# EAGLE board CT_schematic (EAGLE 7.6.0)

Size 100 x 80 mm. Coordinates in mm from the lower left corner, seen from the top.
Outline: 0,0 100,0 100,80 0,80 0,0
Copper layers (1*16): Top 0.035mm / dielectric 1.5mm / Bottom 0.035mm
Design rules "default": minimum track width 10mil, minimum drill 24mil, track to track 8mil, track to pad 8mil, pad to pad 8mil, via to via 8mil, smd to smd 8mil, copper to edge 40mil, drill to drill 8mil, minimum pad ring 10mil, minimum via ring 8mil, stop-mask expansion 4mil, vias tented up to drill 0mil, thermal gap 10mil

## Footprints (pad centres in the part's own frame; a part is rotated, then mirrored left to right if it is on the bottom)
C0603 = smd 0.8 x 0.8: 1 -0.762,0; 2 0.762,0
C0402 = smd 0.5 x 0.5: 1 -0.508,0; 2 0.508,0
C1210 = smd 1.2 x 2.5: 1 -1.524,0; 2 1.524,0
C0805 = smd 1.2 x 1.3: 1 -1.016,0; 2 1.016,0
EXV-9B = smd 2.718 x 1.778: 1 -2.108,0; 2 2.108,0
EXV-9H = smd 3.505 x 1.676: 1 -2.857,0; 2 2.857,0
PJ-037B_PACKAGE = drill 3.7 square: 1 12,0 | drill 3.2 square: 2 6,0
R0603 = smd 0.8 x 0.8: 1 -0.762,0; 2 0.762,0
UFBGA64 = smd 0.2 x 0.2: A1 -1.75,1.75; A2 -1.25,1.75; A3 -0.75,1.75; A4 -0.25,1.75; A5 0.25,1.75; A6 0.75,1.75; A7 1.25,1.75; A8 1.75,1.75; B1 -1.75,1.25; B2 -1.25,1.25; B3 -0.75,1.25; B4 -0.25,1.25; B5 0.25,1.25; B6 0.75,1.25; B7 1.25,1.25; B8 1.75,1.25; C1 -1.75,0.75; C2 -1.25,0.75; C3 -0.75,0.75; C4 -0.25,0.75; C5 0.25,0.75; C6 0.75,0.75; C7 1.25,0.75; C8 1.75,0.75; D1 -1.75,0.25; D2 -1.25,0.25; D3 -0.75,0.25; D4 -0.25,0.25; D5 0.25,0.25; D6 0.75,0.25; D7 1.25,0.25; D8 1.75,0.25; E1 -1.75,-0.25; E2 -1.25,-0.25; E3 -0.75,-0.25; E4 -0.25,-0.25; E5 0.25,-0.25; E6 0.75,-0.25; E7 1.25,-0.25; E8 1.75,-0.25; F1 -1.75,-0.75; F2 -1.25,-0.75; F3 -0.75,-0.75; F4 -0.25,-0.75; F5 0.25,-0.75; F6 0.75,-0.75; F7 1.25,-0.75; F8 1.75,-0.75; G1 -1.75,-1.25; G2 -1.25,-1.25; G3 -0.75,-1.25; G4 -0.25,-1.25; G5 0.25,-1.25; G6 0.75,-1.25; G7 1.25,-1.25; G8 1.75,-1.25; H1 -1.75,-1.75; H2 -1.25,-1.75; H3 -0.75,-1.75; H4 -0.25,-1.75; H5 0.25,-1.75; H6 0.75,-1.75; H7 1.25,-1.75; H8 1.75,-1.75
TST-110-05-T-D-RA = drill 1 pad 1.7 square: 1 0,0 | drill 1 pad 1.7: 2 0,2.54; 3 2.54,0; 4 2.54,2.54; 5 5.08,0; 6 5.08,2.54; 7 7.62,0; 8 7.62,2.54; 9 10.16,0; 10 10.16,2.54; 11 12.7,0; 12 12.7,2.54; 13 15.24,0; 14 15.24,2.54; 15 17.78,0; 16 17.78,2.54; 17 20.32,0; 18 20.32,2.54; 19 22.86,0; 20 22.86,2.54
SOIC-8 = smd 1.6 x 0.6: 1 -2.7,1.905 | smd 1.55 x 0.6: 2 -2.7,0.635; 3 -2.7,-0.635; 4 -2.7,-1.905; 5 2.7,-1.905; 6 2.7,-0.635; 7 2.7,0.635; 8 2.7,1.905
SSOP-28 = smd 1.5 x 0.4: 1 -3.625,4.225; 2 -3.625,3.575; 3 -3.625,2.925; 4 -3.625,2.275; 5 -3.625,1.625; 6 -3.625,0.975; 7 -3.625,0.325; 8 -3.625,-0.325; 9 -3.625,-0.975; 10 -3.625,-1.625; 11 -3.625,-2.275; 12 -3.625,-2.925; 13 -3.625,-3.575; 14 -3.625,-4.225; 15 3.625,-4.225; 16 3.625,-3.575; 17 3.625,-2.925; 18 3.625,-2.275; 19 3.625,-1.625; 20 3.625,-0.975; 21 3.625,-0.325; 22 3.625,0.325; 23 3.625,0.975; 24 3.625,1.625; 25 3.625,2.275; 26 3.625,2.925; 27 3.625,3.575; 28 3.625,4.225
182-009-MALE = drill 1.194 pad 1.524 octagon: 1 -5.537,10.923; 2 -2.769,10.923; 3 0,10.923; 4 2.769,10.923; 5 5.537,10.923; 6 -4.153,8.08; 7 -1.384,8.08; 8 1.384,8.08; 9 4.153,8.08 | hole 3.048: -12.446,9.501; 12.446,9.501
QFN-28 = smd 0.813 x 0.305: 1 -2.451,1.5; 2 -2.451,1; 3 -2.451,0.5; 4 -2.451,0; 5 -2.451,-0.5; 6 -2.451,-1; 7 -2.451,-1.5; 15 2.451,-1.5; 16 2.451,-1; 17 2.451,-0.5; 18 2.451,0; 19 2.451,0.5; 20 2.451,1; 21 2.451,1.5 | smd 0.305 x 0.813: 8 -1.5,-2.451; 9 -1,-2.451; 10 -0.5,-2.451; 11 0,-2.451; 12 0.5,-2.451; 13 1,-2.451; 14 1.5,-2.451; 22 1.5,2.451; 23 1,2.451; 24 0.5,2.451; 25 0,2.451; 26 -0.5,2.451; 27 -1,2.451; 28 -1.5,2.451 | smd 3.607 x 3.607: 29 0,0
SJ-43515TS-SMT-TR = smd 2.2 x 3: 1 0.6,-7.4; 4 3.4,-7.4 | smd 3 x 3: 2 12.8,-7.4; 5 17,-3 | smd 2 x 3: 3 5.3,0; 6 2.5,0 | drill 1.8: P$7 4.5,-3.69; P$8 11.54,-3.69
ASEK = smd 1.4 x 1: 1 -1.1,-0.8; 2 1.1,-0.8; 3 1.1,0.8; 4 -1.1,0.8
ASFL1 = smd 1.7 x 1.5: 1 -1.27,-1.1; 2 1.27,-1.1; 3 1.27,1.1; 4 -1.27,1.1
LP2954 = smd 1.6 x 0.6: 1 -2.475,1.905 | smd 1.55 x 0.6: 2 -2.475,0.635; 3 -2.475,-0.635; 4 -2.475,-1.905; 5 2.475,-1.905; 6 2.475,-0.635; 7 2.475,0.635; 8 2.475,1.905
SON-6 = smd 0.55 x 0.3: 1 -0.355,0.5 | smd 0.52 x 0.3: 2 -0.37,0; 3 -0.37,-0.5; 4 0.37,-0.5; 5 0.37,0; 6 0.37,0.5
SW_4-1437565-2 = smd 1.4 x 2.1: 1 -2.23,4.55; 2 -2.23,-4.55; 3 2.23,4.55; 4 2.23,-4.55
LGM67K-G1J2-24-Z = smd 0.8 x 1.4: A -2,0; C 0,0
NC7SZ125M5X = smd 1.3 x 0.7: 1 -1.3,0.95; 2 -1.3,0; 3 -1.3,-0.95; 4 1.3,-0.95; 5 1.3,0.95

## Placement (x,y rotation side)
C1  1e-06  [C0603]  -63.5,82.55 0 top  (outside the outline)
C2  1e-07  [C0603]  -67.31,82.55 0 top  (outside the outline)
C3  1e-07  [C0603]  -71.12,82.55 0 top  (outside the outline)
C4  1e-07  [C0603]  -74.93,82.55 0 top  (outside the outline)
C5  1e-07  [C0603]  -78.74,82.55 0 top  (outside the outline)
C6  1e-07  [C0603]  -82.55,82.55 0 top  (outside the outline)
C7  4.7e-06  [C0603]  -59.69,82.55 0 top  (outside the outline)
C8  1e-08  [C0603]  -15.24,87.63 0 top  (outside the outline)
C9  1e-06  [C0603]  -19.05,87.63 0 top  (outside the outline)
C10  1e-07  [C0402]  -45.72,87.63 0 top  (outside the outline)
C11  1e-08  [C0402]  -49.53,87.63 0 top  (outside the outline)
C12  1e-07  [C0402]  -53.34,87.63 0 top  (outside the outline)
C13  1e-07  [C0402]  -57.15,87.63 0 top  (outside the outline)
C14  1e-07  [C0402]  -60.96,87.63 0 top  (outside the outline)
C15  1e-07  [C0402]  -64.77,87.63 0 top  (outside the outline)
C16  1e-07  [C0402]  -68.58,87.63 0 top  (outside the outline)
C17  2.2e-05  [C1210]  -48.26,69.85 0 top  (outside the outline)
C18  2.2e-05  [C1210]  -54.61,69.85 0 top  (outside the outline)
C19  1e-09  [C0402]  -72.39,87.63 0 top  (outside the outline)
C20  1e-09  [C0402]  -76.2,87.63 0 top  (outside the outline)
C21  1e-07  [C0402]  -80.01,87.63 0 top  (outside the outline)
C22  1e-07  [C0402]  -15.24,92.71 0 top  (outside the outline)
C23  1e-07  [C0402]  -19.05,92.71 0 top  (outside the outline)
C24  1e-07  [C0402]  -22.86,92.71 0 top  (outside the outline)
C25  1e-07  [C0402]  -26.67,92.71 0 top  (outside the outline)
C26  1e-05  [C0805]  -21.59,76.2 0 top  (outside the outline)
C27  1e-05  [C0805]  -26.67,76.2 0 top  (outside the outline)
C28  1e-05  [C0805]  -31.75,76.2 0 top  (outside the outline)
C29  1e-05  [C0805]  -36.83,76.2 0 top  (outside the outline)
C30  1e-05  [C0805]  -41.91,76.2 0 top  (outside the outline)
C31  1e-08  [C0402]  -30.48,92.71 0 top  (outside the outline)
C32  1e-08  [C0402]  -34.29,92.71 0 top  (outside the outline)
C33  1e-08  [C0402]  -38.1,92.71 0 top  (outside the outline)
C34  1e-06  [EXV-9B]  -62.23,68.58 0 top  (outside the outline)
C35  2.2e-06  [EXV-9B]  -71.12,68.58 0 top  (outside the outline)
C36  1e-07  [C0402]  -41.91,92.71 0 top  (outside the outline)
C37  0.0001  [EXV-9H]  -74.93,62.23 0 top  (outside the outline)
C38  0.0001  [EXV-9H]  -17.78,69.85 0 top  (outside the outline)
C39  1e-08  [C0402]  -45.72,92.71 0 top  (outside the outline)
C40  1e-08  [C0402]  -49.53,92.71 0 top  (outside the outline)
J1  PJ-037B  [PJ-037B_PACKAGE]  -83.82,29.21 0 top  (outside the outline)
R2  1000.0  [R0603]  -22.86,87.63 0 top  (outside the outline)
R4  4700.0  [R0603]  -26.67,87.63 0 top  (outside the outline)
R5  2200.0  [R0603]  -30.48,87.63 0 top  (outside the outline)
R6  2200.0  [R0603]  -34.29,87.63 0 top  (outside the outline)
R7  10000.0  [R0603]  -82.55,76.2 0 top  (outside the outline)
R8  10000.0  [R0603]  -15.24,82.55 0 top  (outside the outline)
R9  10000.0  [R0603]  -20.32,82.55 0 top  (outside the outline)
R10  10000.0  [R0603]  -25.4,82.55 0 top  (outside the outline)
R11  10000.0  [R0603]  -30.48,82.55 0 top  (outside the outline)
R12  100000.0  [R0603]  -52.07,76.2 0 top  (outside the outline)
R13  47000.0  [R0603]  -35.56,82.55 0 top  (outside the outline)
R14  47000.0  [R0603]  -40.64,82.55 0 top  (outside the outline)
R15  47000.0  [R0603]  -45.72,82.55 0 top  (outside the outline)
R16  680.0  [R0603]  -38.1,87.63 0 top  (outside the outline)
R17  100000.0  [R0603]  -57.15,76.2 0 top  (outside the outline)
R18  100000.0  [R0603]  -62.23,76.2 0 top  (outside the outline)
R19  164658.62  [R0603]  -46.99,76.2 0 top  (outside the outline)
R20  100000.0  [R0603]  -67.31,76.2 0 top  (outside the outline)
R21  10000.0  [R0603]  -50.8,82.55 0 top  (outside the outline)
R22  10000.0  [R0603]  -55.88,82.55 0 top  (outside the outline)
R23  9100.0  [R0603]  -41.91,87.63 0 top  (outside the outline)
R24  680000.0  [R0603]  -72.39,76.2 0 top  (outside the outline)
R25  120000.0  [R0603]  -77.47,76.2 0 top  (outside the outline)
U1  STM32L431RCI6  [UFBGA64]  -74.93,41.91 0 top  (outside the outline)
U2  TST-110-05-T-D-RA  [TST-110-05-T-D-RA]  -46.99,59.69 0 top  (outside the outline)
U3  24AA1025T-I/SN  [SOIC-8]  -59.69,41.91 0 top  (outside the outline)
U4  ST3241EBPR  [SSOP-28]  -58.42,7.62 0 top  (outside the outline)
U5  182-009-113R531  [182-009-MALE]  -36.83,6.35 0 top  (outside the outline)
U6  WM8731CLSEFL  [QFN-28]  -40.64,69.85 0 top  (outside the outline)
U7  SJ-43515TS-SMT-TR  [SJ-43515TS-SMT-TR]  -39.37,31.75 0 top  (outside the outline)
U8  SJ-43515TS-SMT-TR  [SJ-43515TS-SMT-TR]  -67.31,31.75 0 top  (outside the outline)
U9  ASEK-32.768KHz-ECST  [ASEK]  -66.04,62.23 0 top  (outside the outline)
U10  ASFL1-12.288MHZ-EC-T  [ASFL1]  -30.48,53.34 0 top  (outside the outline)
U11  ASFL1-25MHZ-NCS  [ASFL1]  -46.99,53.34 0 top  (outside the outline)
U12  LP2954AIMX/NOPB  [LP2954]  -44.45,41.91 0 top  (outside the outline)
U13  TPS3895ADRYR  [SON-6]  -52.07,91.44 0 top  (outside the outline)
U14  4-1437565-2  [SW_4-1437565-2]  -27.94,43.18 0 top  (outside the outline)
U15  Q65110A2395  [LGM67K-G1J2-24-Z]  -27.94,69.85 0 top  (outside the outline)
U16  nc7sz125m5x  [NC7SZ125M5X]  -78.74,68.58 0 top  (outside the outline)
U17  nc7sz125m5x  [NC7SZ125M5X]  -15.24,76.2 0 top  (outside the outline)

## Library data of the parts
C1-C40 J1 R2 R4-R25 U1-U17 = circuit_tree

## Nets
CLK_U1_A1: U1.A1 U9.3
CLK_U1_C1: U1.C1 U11.3
CLK_U6_1: U6.1 U10.3
GND: C1.2 C2.2 C3.2 C4.2 C5.2 C6.2 C7.2 C8.2 C9.2 C10.2 C11.2 C12.2 C15.2 C16.2 C20.2 C21.2 C22.2 C23.2 C24.2 C25.2 C26.2 C27.2 C28.2 C29.2 C30.2 C31.2 C32.2 C33.2 C34.2 C35.2 C36.2 C37.2 C38.2 C39.2 C40.2 J1.2 R2.2 R7.2 R10.2 R13.2 R14.2 R15.2 R20.2 R23.2 R25.2 U1.C2 U1.D4 U1.D5 U1.D6 U1.F1 U2.4 U2.6 U2.8 U2.10 U2.12 U2.14 U2.16 U2.18 U2.20 U3.4 U3.7 U4.23 U4.25 U5.5 U6.4 U6.15 U6.19 U6.25 U6.26 U6.29 U7.1 U8.1 U9.2 U10.2 U11.2 U12.4 U13.2 U15.C U16.2 U16.3 U17.1 U17.3
NET_U1_A3: R6.1 U1.A3 U3.5
NET_U1_B3: R5.1 U1.B3 U3.6
NET_U1_B4: R7.1 U1.B4
NET_U1_E1: R4.1 U1.E1 U17.4
NET_U1_H7: U15.A
NET_U1_H8: U14.3 U14.4
NET_U3_1: R10.1 U3.1
NET_U3_2: R11.1 U3.2
NET_U3_3: R9.1 U3.3
NET_U4_1: C14.1 U4.1
NET_U4_2: C14.2 U4.2
NET_U4_3: C16.1 U4.3
NET_U4_22: R12.1 U4.22
NET_U4_24: C13.2 U4.24
NET_U4_27: C15.1 U4.27
NET_U4_28: C13.1 U4.28
NET_U5_2: U4.4 U5.2
NET_U5_3: U4.9 U5.3
NET_U5_7: U4.5 U5.7
NET_U5_8: U4.10 U5.8
NET_U6_9: U6.9
NET_U6_20: C25.1 C30.1 U6.20
NET_U7_2: C18.1 R14.1 U7.2
NET_U7_5: C17.1 R13.1 U7.5
NET_U7_13: C17.2
NET_U7_14: C18.2
NET_U8_5: C19.1 C20.1 R15.1 R16.1 U8.5
NET_U8_21: R16.2
NET_U8_22: C19.2
NET_U12_3: R18.1 U12.3
NET_U12_5: R17.1 U12.5
NET_U12_7: R19.2 R20.1 U12.7
NET_U13_1: R22.1 R23.1 U13.1
NET_U13_3: R24.2 R25.1 U13.3
NET_U13_4: R21.1 U13.4 U16.4 U17.2
NET_U14_1: R2.1 U14.1 U14.2
PROC_LPUART1_CTS: U4.13
PROC_LPUART1_RTS: U4.18
PROC_LPUART1_RX: U4.19
PROC_LPUART1_TX: U4.14
PROC_SAI1_FS_A: U1.C7 U6.9 U6.11
PROC_SAI1_SCK_A: U1.D7 U6.7
PROC_SAI1_SD_A: U1.C6 U6.8
PROC_SYS_JTCK_SWCLK: U1.A7 U2.9
PROC_SYS_JTDO_SWO: U1.A5 U2.13
PROC_SYS_JTMS_SWDIO: U1.A8 U2.7
RST_OUT_U2_SRESET_B: R8.1 U2.15 U16.1
VCC_S1_6V7: C34.1 C37.1 C38.1 J1.1 R18.2 U12.8
VCC_TIER1_3V3: C1.1 C2.1 C3.1 C4.1 C5.1 C6.1 C7.1 C8.1 C9.1 C10.1 C11.1 C12.1 C21.1 C22.1 C23.1 C24.1 C26.1 C27.1 C28.1 C29.1 C31.1 C32.1 C33.1 C35.1 C36.1 C39.1 C40.1 R4.2 R5.2 R6.2 R8.2 R9.2 R11.2 R12.2 R17.2 R19.1 R21.2 R22.2 R24.1 U1.B2 U1.D2 U1.E4 U1.E5 U1.E6 U1.H1 U2.1 U3.8 U4.26 U6.3 U6.5 U6.12 U6.18 U9.4 U10.4 U11.4 U12.1 U13.6 U16.5 U17.5

## Tracks (layer width: path | path; a pad name or v marks a point on that pad's centre or on a via)
CLK_U1_A1  (1 unrouted)
CLK_U1_C1  (1 unrouted)
CLK_U6_1  (1 unrouted)
GND  (81 unrouted)
NET_U1_A3  (2 unrouted)
NET_U1_B3  (2 unrouted)
NET_U1_B4  (1 unrouted)
NET_U1_E1  (2 unrouted)
NET_U1_H8  (1 unrouted)
NET_U3_1  (1 unrouted)
NET_U3_2  (1 unrouted)
NET_U3_3  (1 unrouted)
NET_U4_1  (1 unrouted)
NET_U4_2  (1 unrouted)
NET_U4_3  (1 unrouted)
NET_U4_22  (1 unrouted)
NET_U4_24  (1 unrouted)
NET_U4_27  (1 unrouted)
NET_U4_28  (1 unrouted)
NET_U5_2  (1 unrouted)
NET_U5_3  (1 unrouted)
NET_U5_7  (1 unrouted)
NET_U5_8  (1 unrouted)
NET_U6_20  (2 unrouted)
NET_U7_2  (2 unrouted)
NET_U7_5  (2 unrouted)
NET_U8_5  (4 unrouted)
NET_U12_3  (1 unrouted)
NET_U12_5  (1 unrouted)
NET_U12_7  (2 unrouted)
NET_U13_1  (2 unrouted)
NET_U13_3  (2 unrouted)
NET_U13_4  (3 unrouted)
NET_U14_1  (2 unrouted)
PROC_SAI1_FS_A  (2 unrouted)
PROC_SAI1_SCK_A  (1 unrouted)
PROC_SAI1_SD_A  (1 unrouted)
PROC_SYS_JTCK_SWCLK  (1 unrouted)
PROC_SYS_JTDO_SWO  (1 unrouted)
PROC_SYS_JTMS_SWDIO  (1 unrouted)
RST_OUT_U2_SRESET_B  (2 unrouted)
VCC_S1_6V7  (5 unrouted)
VCC_TIER1_3V3  (58 unrouted)